# EAGLE board Syn-ShieldCarger-v07-tmp-a2 (EAGLE 5.10)
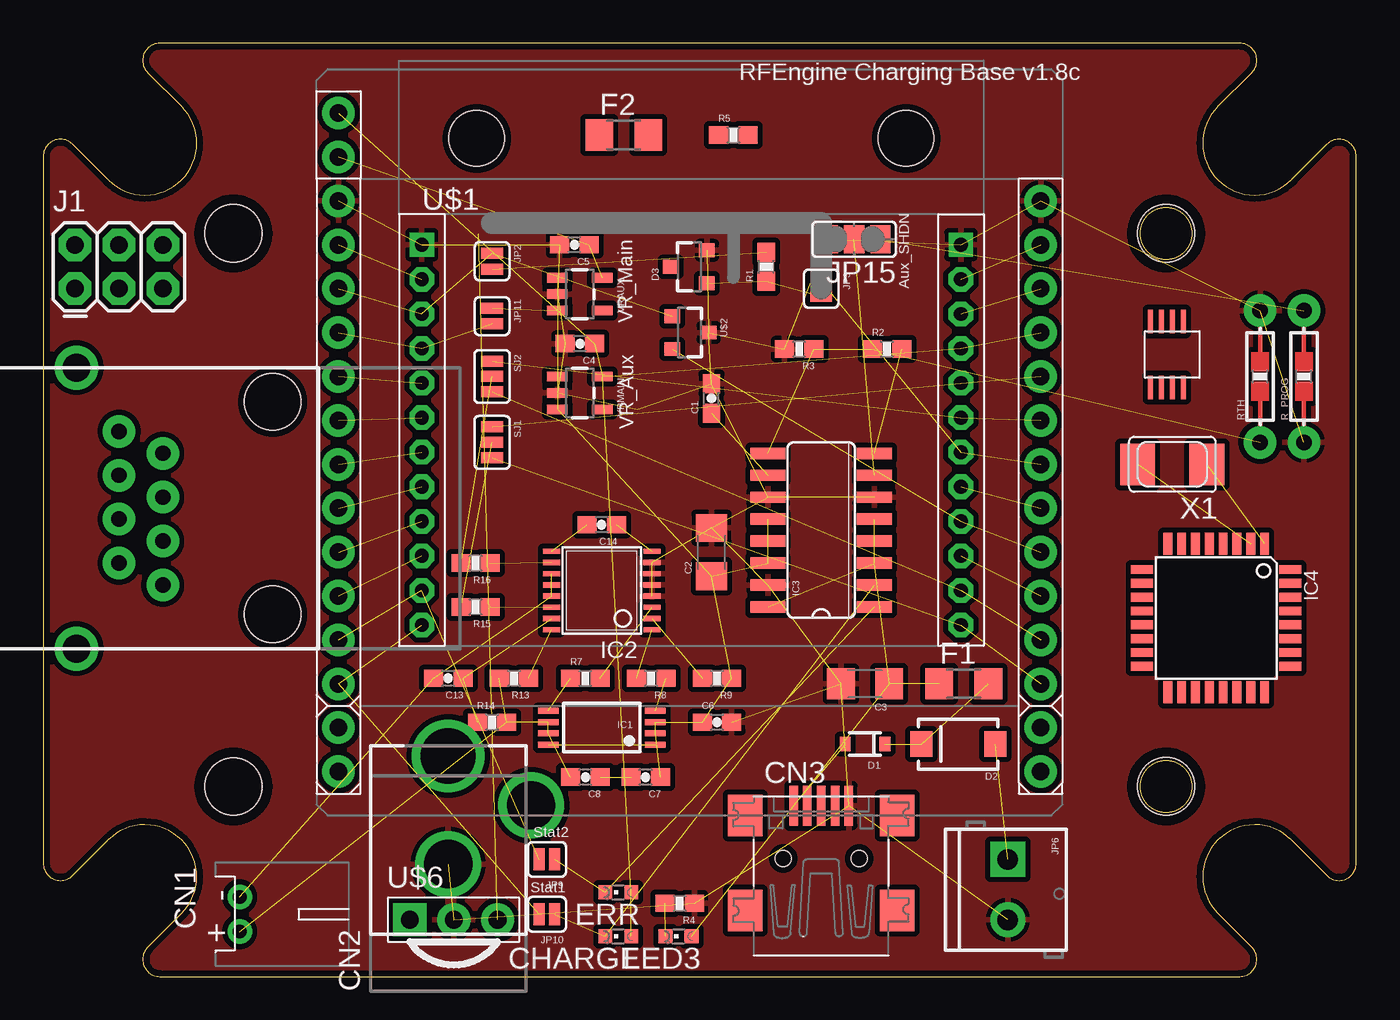
[diagram p0: board, top side]
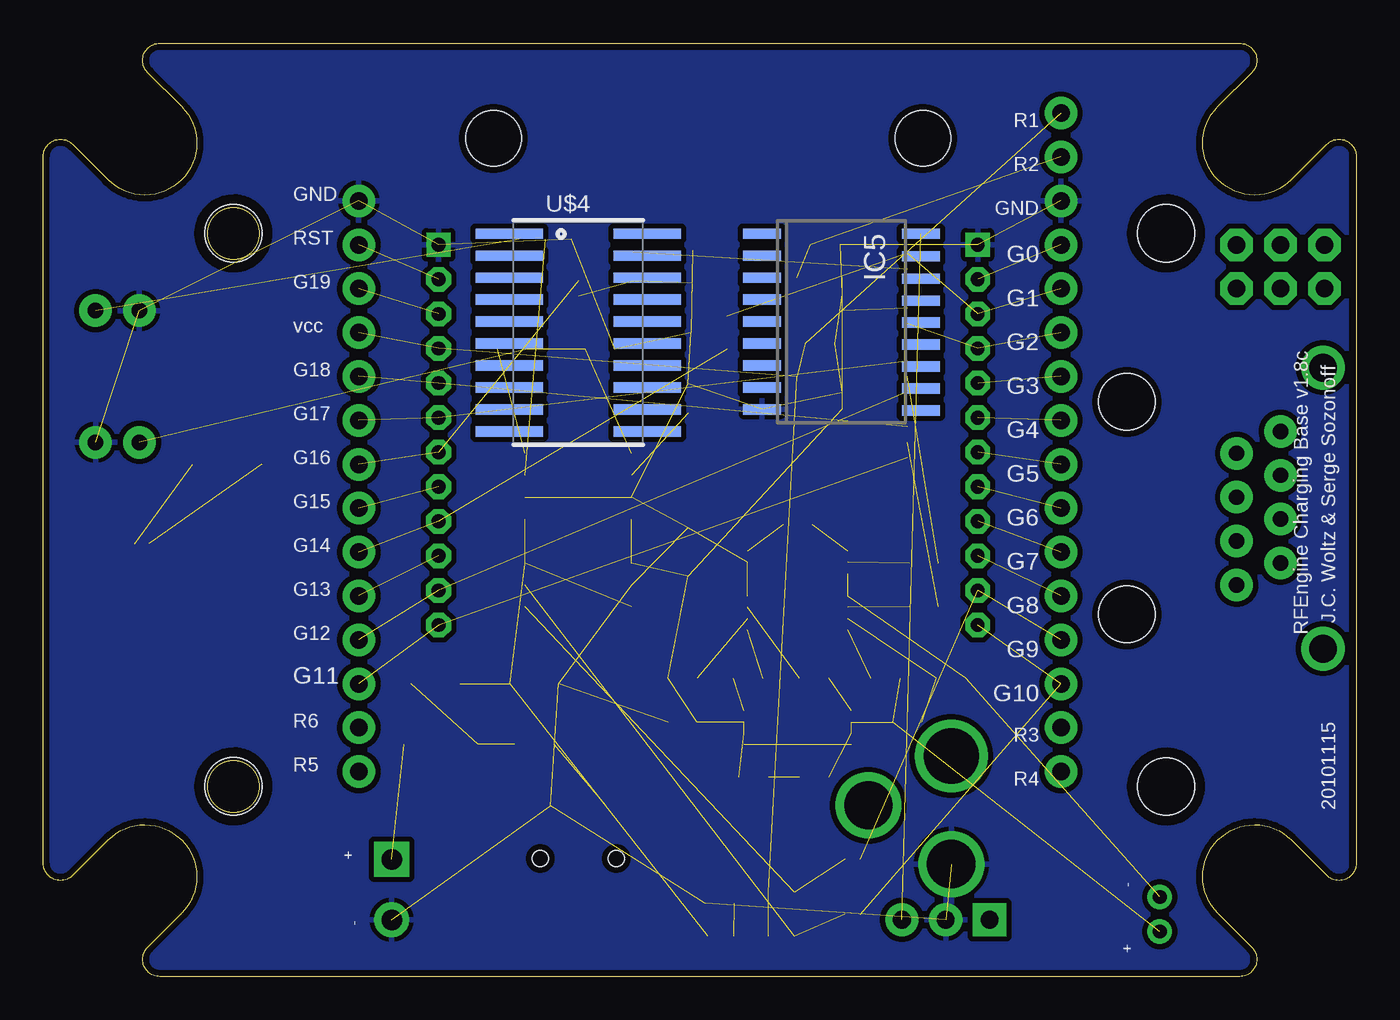
[diagram p1: board, bottom side, seen from below]

Size 76 x 54 mm. Coordinates in mm from the lower left corner, seen from the top.
Outline: 72.24,46.1 arc-180 68,50.34 69.95,52.29 arc135 69.24,54 6.75,54 arc135 6.05,52.29 8,50.34 arc-180 3.76,46.1 1.71,48.15 arc135 0,47.44 0,6.55 arc135 1.71,5.85 3.76,7.9 arc-180 8,3.66 6.05,1.71 arc135 6.75,0 69.24,0 arc135 69.95,1.71 68,3.66 arc-180 72.24,7.9 74.29,5.85 arc135 76,6.55 76,47.44 arc135 74.29,48.15 72.24,46.1
Outline: circle at 64.99,43 radius 1.5
Outline: circle at 64.99,11 radius 1.5
Copper layers (1*16): Top 0.0356mm / dielectric 1.5011mm / Bottom 0.0356mm
Design rules "LaenPCBOrder-JCModified *": minimum track width 10mil, minimum drill 13mil, track to track 10mil, track to pad 6mil, pad to pad 6mil, via to via 6mil, smd to smd 6mil, copper to edge 15mil, drill to drill 6mil, minimum pad ring 12mil, minimum via ring 7mil, stop-mask expansion 4mil, vias tented up to drill 25mil, thermal gap 10mil

## Footprints (pad centres in the part's own frame; a part is rotated, then mirrored left to right if it is on the bottom)
0603-CAP = smd 1.1 x 1: 1 -0.85,0; 2 0.85,0
1206 = smd 1.6 x 1.8: 1 -1.4,0; 2 1.4,0
CHIPLED_0603 = smd 0.8 x 0.8: A 0,-0.75; C 0,0.75
JST-PH-2-THM-RA = drill 0.8 pad 1.422 round: 1 1,0; 2 -1,0
DCJACK_2MM_PTH = drill 2.8 round: GND 0,7.35; GNDBREAK 4.8,10.75 | drill 3.2 round: PWR 0,13.6
USB-MINIB = smd 0.5 x 2.308: D+ 0,4.064; D- -0.8,4.064; GND 1.6,4.064; ID 0.8,4.064; VBUS -1.6,4.064 | smd 2 x 2.4: GND1 -4.4,-2; GND2 -4.4,3.5; GND3 4.4,3.5; GND4 4.4,-2 | hole 0.9: -2.2,1; 2.2,1
SOD-323 = smd 0.63 x 0.83: 1 -1.15,0; 2 1.15,0
SMA-DIODE = smd 1.27 x 1.47: A -2.15,0; C 2.15,0
SOT23-3 = smd 0.8 x 0.9: 1 -0.95,-1; 2 0.95,-1; 3 0,1.1
R1206 = smd 1.6 x 1.803: 1 -1.422,0; 2 1.422,0
TSSOP8-4.4MM = smd 1.2 x 0.35: 1 -3.1,0.975; 2 -3.1,0.325; 3 -3.1,-0.325; 4 -3.1,-0.975; 5 3.1,-0.975; 6 3.1,-0.325; 7 3.1,0.325; 8 3.1,0.975
DS2764 = smd 0.305 x 0.991: CC -2.275,-2.918; DC -0.975,-2.918; IS1 2.275,2.918; IS2 2.275,-2.918; PLS -1.625,-2.918; PS 1.625,-2.918; SCL -0.975,2.918; SDA 1.625,2.918; SNS -0.325,-2.918; SNS1 0.325,-2.918; SNS2 0.975,-2.918; VDD -1.625,2.918; VIN -2.275,2.918; VSS -0.325,2.918; VSS1 0.325,2.918; VSS2 0.975,2.918
SO16-150MIL = smd 0.66 x 2.032: 1 -4.445,-3.073; 2 -3.175,-3.073; 3 -1.905,-3.073; 4 -0.635,-3.073; 5 0.635,-3.073; 6 1.905,-3.073; 7 3.175,-3.073; 8 4.445,-3.073; 9 4.445,3.073; 10 3.175,3.073; 11 1.905,3.073; 12 0.635,3.073; 13 -0.635,3.073; 14 -1.905,3.073; 15 -3.175,3.073; 16 -4.445,3.073
TQFP32-08 = smd 1.27 x 0.508: 1 -4.293,2.8; 2 -4.293,2; 3 -4.293,1.2; 4 -4.293,0.4; 5 -4.293,-0.4; 6 -4.293,-1.2; 7 -4.293,-2; 8 -4.293,-2.8; 17 4.293,-2.8; 18 4.293,-2; 19 4.293,-1.2; 20 4.293,-0.4; 21 4.293,0.4; 22 4.293,1.2; 23 4.293,2; 24 4.293,2.8 | smd 0.508 x 1.27: 9 -2.8,-4.293; 10 -2,-4.293; 11 -1.2,-4.293; 12 -0.4,-4.293; 13 0.4,-4.293; 14 1.2,-4.293; 15 2,-4.293; 16 2.8,-4.293; 25 2.8,4.293; 26 2,4.293; 27 1.2,4.293; 28 0.4,4.293; 29 -0.4,4.293; 30 -1.2,4.293; 31 -2,4.293; 32 -2.8,4.293
SO18W = smd 0.6 x 2.2: 1 -4.445,-4.6; 2 -3.175,-4.6; 3 -1.905,-4.6; 4 -0.635,-4.6; 5 0.635,-4.6; 6 1.905,-4.6; 7 3.175,-4.6; 8 4.445,-4.6; 9 5.715,-4.6; 10 5.775,4.6; 11 4.505,4.6; 12 3.235,4.6; 13 1.965,4.6; 14 0.695,4.6; 15 -0.575,4.6; 16 -1.845,4.6; 17 -3.145,4.6; 18 -4.445,4.6
2X3 = drill 1.016 pad 1.88 octagon: 1 0,0; 2 0,2.54; 3 2.54,0; 4 2.54,2.54; 5 5.08,0; 6 5.08,2.54
SJ_2S = smd 0.635 x 1.27: 1 -0.45,0; 2 0.45,0
STAND-OFF = hole 3.302: 0,0
SCREWTERMINAL-3.5MM-2 = drill 1.2 pad 2.032 square: 1 0,0 | drill 1.2 pad 2.032 round: 2 3.5,0
SJ_2 = smd 1.168 x 1.6: 1 -1.524,0; 2 0,0; 3 1.524,0
0603-RES = smd 1.1 x 1: 1 -0.85,0; 2 0.85,0
AXIAL-0603 = drill 0.9 pad 1.88 round: P$1 -3.81,0; P$2 3.81,0
SJ_3 = smd 0.635 x 1.27: 1 -0.889,0; 2 0,0; 3 0.889,0
SYNAPSERFENGINE-THM = drill 0.8 square: 1 0,0; 24 31.2,0 | drill 0.8 pad 1.422 octagon: 2 0,-2; 3 0,-4; 4 0,-6; 5 0,-8; 6 0,-10; 7 0,-12; 8 0,-14; 9 0,-16; 10 0,-18; 11 0,-20; 12 0,-22; 13 31.2,-22; 14 31.2,-20; 15 31.2,-18; 16 31.2,-16; 17 31.2,-14; 18 31.2,-12; 19 31.2,-10; 20 31.2,-8; 21 31.2,-6; 22 31.2,-4; 23 31.2,-2 | hole 3.2: 3.17,6.16; 28.03,6.16
SYNSJ-STACK = drill 1.016 pad 1.88 round: G0 0,-7.62; G1 0,-10.16; G2 0,-12.7; G3 0,-15.24; G4 0,-17.78; G5 0,-20.32; G6 0,-22.86; G7 0,-25.4; G8 0,-27.94; G9 0,-30.48; G10 0,-33.02; G11 40.64,-33.02; G12 40.64,-30.48; G13 40.64,-27.94; G14 40.64,-25.4; G15 40.64,-22.86; G16 40.64,-20.32; G17 40.64,-17.78; G18 40.64,-15.24; GND 0,-5.08; GND1 40.64,-5.08; R1 0,0; R2 0,-2.54; R3 0,-35.56; R4 0,-38.1; R5 40.64,-38.1; R6 40.64,-35.56; RESERVED 40.64,-10.16; RESET 40.64,-7.62; VCC 40.64,-12.7
SO20W = smd 0.6 x 3.9: P$1 -5.715,-4; P$2 -4.445,-4; P$3 -3.175,-4; P$4 -1.905,-4; P$5 -0.635,-4; P$6 0.635,-4; P$7 1.905,-4; P$8 3.175,-4; P$9 4.445,-4; P$10 5.715,-4; P$11 5.715,4; P$12 4.445,4; P$13 3.175,4; P$14 1.905,4; P$15 0.635,4; P$16 -0.635,4; P$17 -1.905,4; P$18 -3.175,4; P$19 -4.445,4; P$20 -5.715,4
DCT = smd 0.3 x 1.35: 1 -1.27,-1.905; 2 -0.635,-1.905; 3 0,-1.905; 4 0.635,-1.905; 5 0.635,1.905; 6 0,1.905; 7 -0.635,1.905; 8 -1.27,1.905
PNA460XM = drill 1.016 pad 1.93 square: 1 -2.54,0 | drill 1.016 pad 1.93 round: 2 0,0; 3 2.54,0
XPORT = drill 0.889 pad 1.88 round: 1 -3.175,7.62; 8 4.445,7.62; 10 -4.445,5.08; P1 4.445,7.62; P2 3.175,5.08; P3 1.905,7.62; P4 0.635,5.08; P5 -0.635,7.62; P6 -1.905,5.08; P7 -3.175,7.62; P8 -4.445,5.08 | drill 1.6 pad 2.54 round: GND@9 -8.128,10.081; GND@10 8.128,10.081 | hole 3.251: -6.147,-1.27; 6.147,-1.27
SOT23-5 = smd 0.55 x 1.2: 1 -0.95,-1.3; 2 0,-1.3; 3 0.95,-1.3; 4 0.95,1.3; 5 -0.95,1.3
NX5032 = smd 2 x 2.4: P$1 2,0; P$2 -2,0

## Placement (x,y rotation side)
C1  0.47uF  [0603-CAP]  38.68,33.45 90 top
C2  10uF  [1206]  38.68,24.56 90 top
C3  10uF  [1206]  47.57,16.94 180 top
C4  1uF  [0603-CAP]  31.06,36.62 180 top
C5  1uF  [0603-CAP]  30.74,42.34 180 top
C6  1nF  [0603-CAP]  39,14.72 0 top
C7  [0603-CAP]  34.87,11.54 180 top
C8  [0603-CAP]  31.38,11.54 180 top
C13  0.1uF  [0603-CAP]  23.44,17.26 180 top
C14  0.1uF  [0603-CAP]  32.33,26.15 180 top
CHARGE  ORG  [CHIPLED_0603]  33.28,2.33 90 top
CN1  [JST-PH-2-THM-RA]  11.37,3.6 270 top
CN2  [DCJACK_2MM_PTH]  23.44,-0.84 0 top
CN3  [USB-MINIB]  45.03,5.83 0 top
D1  [SOD-323]  47.57,13.45 180 top
D2  [SMA-DIODE]  52.97,13.45 180 top
D3  ADR510  [SOT23-3]  37.41,41.07 90 top
ERR  RED  [CHIPLED_0603]  33.28,4.87 90 top
F1  [R1206]  53.28,16.94 0 top
F2  [R1206]  33.6,48.69 0 top
IC1  IRF7750  [TSSOP8-4.4MM]  32.33,14.4 180 top
IC2  DS2764  [DS2764]  32.33,22.34 90 top
IC3  [SO16-150MIL]  45.03,25.83 90 top
IC4  ATMEGA32U2-TQFP  [TQFP32-08]  67.89,20.75 270 top
IC5  MCP2300X/SO  [SO18W]  29.79,38.53 270 bottom
J1  AVR_SPI_PRG_6PTH  [2X3]  1.85,39.8 0 top
JP2  [SJ_2S]  25.98,41.39 270 top
JP3  [SJ_2S]  45.03,39.8 270 top
JP4  STAND-OFF  [STAND-OFF]  64.99,43 0 top
JP5  STAND-OFF  [STAND-OFF]  11.01,43 0 top
JP6  [SCREWTERMINAL-3.5MM-2]  55.82,6.78 270 top
JP9  [SJ_2S]  29.15,6.78 180 top
JP10  [SJ_2S]  29.15,3.6 180 top
JP11  [SJ_2S]  25.98,38.21 270 top
JP12  STAND-OFF  [STAND-OFF]  64.99,11 0 top
JP15  [SJ_2]  46.93,42.66 180 top
JP17  STAND-OFF  [STAND-OFF]  11.01,11 0 top
LED3  [CHIPLED_0603]  36.77,2.33 90 top
R1  10K  [0603-RES]  41.85,41.07 90 top
R2  6.19K  [0603-RES]  48.84,36.31 0 top
R3  7.3K  [0603-RES]  43.76,36.31 180 top
R4  1K  [0603-RES]  36.84,4.24 180 top
R5  [0603-RES]  39.95,48.69 0 top
R7  1K  [0603-RES]  31.38,17.26 0 top
R8  1K  [0603-RES]  35.19,17.26 180 top
R9  15R  [0603-RES]  39,17.26 180 top
R13  1K  [0603-RES]  27.25,17.26 180 top
R14  15R  [0603-RES]  25.98,14.72 0 top
R15  15R  [0603-RES]  25.03,21.38 180 top
R16  15R  [0603-RES]  25.03,23.92 180 top
R_PROG  [AXIAL-0603]  72.97,34.72 90 top
RTH  10K @ 25degC  [AXIAL-0603]  70.43,34.72 90 top
SJ1  [SJ_3]  25.98,30.91 270 top
SJ2  [SJ_3]  25.98,34.72 270 top
U$1  SYNAPSEWIRELESS-RFENGINESTD  [SYNAPSERFENGINE-THM]  21.92,42.34 0 top
U$2  MAX6520SOT23-3  [SOT23-3]  37.41,37.26 270 top
U$3  SYNAPSE-SJ-STCKINGD30-1600  [SYNSJ-STACK]  17.09,49.96 0 top
U$4  PCF2129ASO20  [SO20W]  45.03,37.26 270 bottom
U$5  PCA9306DCT  [DCT]  65.35,35.99 0 top
U$6  PNA460XM  [PNA460XM]  23.76,3.29 0 top
U$7  CREATIVE_COMMONS  [CREATIVE_COMMONS]  10.74,-9.73 0 top  (outside the outline)
U$8  XPORT  [XPORT]  12.01,27.1 90 top
VRAUX  MCP1802  [SOT23-5]  31.06,39.48 270 top
VRMAIN  MCP1802  [SOT23-5]  31.06,33.77 270 top
X1  [NX5032]  65.35,29.64 180 top

## Library data of the parts
C1-C8 C13 C14 D1 D2 J1 JP2-JP6 JP9-JP12 JP15 JP17 R1 R4 R5 R7-R9 R13-R16 SJ1 SJ2 U$7 U$8 = SparkFun
CHARGE CN1-CN3 ERR F1 F2 IC4 IC5 LED3 U$6 X1 = adafruit
D3 VRAUX VRMAIN = 0_jc-modified
IC1 IC2 = ssozonoff
IC3 R2 R3 R_PROG RTH U$1-U$5 = 0_jc-custom

## Nets
AUX_SHDN: JP11.1 VRAUX.3
CC: IC2.CC R8.2
DC: IC2.DC R7.2
GND: C1.2 C2.2 C3.2 C4.2 C5.2 C6.2 CN2.GND CN3.GND D3.2 IC2.PS IC2.SNS IC2.SNS1 IC2.SNS2 IC3.6 IC3.11 IC3.15 IC5.9 JP6.2 JP15.3 R3.2 R4.1 R_PROG.P$1 RTH.P$2 U$1.1 U$1.24 U$2.3 U$3.GND U$3.GND1 U$6.2 VRAUX.2 VRMAIN.2
GNDBREAK: CN2.GNDBREAK
GP0: U$1.2 U$3.G0
GP1: JP2.1 U$1.3 U$2.1 U$3.G1
GP2: JP11.2 U$1.4 U$3.G2
GP3: U$1.5 U$3.G3
GP4: U$1.6 U$3.G4
GP5: U$1.7 U$3.G5
GP6: U$1.8 U$3.G6
GP7: U$1.9 U$3.G7
GP8: U$1.10 U$3.G8
GP9: JP9.2 U$1.11 U$3.G9
GP10: JP10.2 U$1.12 U$3.G10
GP11: SJ1.3 U$1.13 U$3.G11
GP12: SJ2.3 U$1.14 U$3.G12
GP13: U$1.15 U$3.G13
GP14: U$1.16 U$2.2 U$3.G14
GP15: U$1.17 U$3.G15
GP16: JP3.1 U$1.18 U$3.G16
GP17: SJ2.1 U$1.19 U$3.G17
GP18: SJ1.1 U$1.20 U$3.G18
GP19: U$1.22 U$3.RESERVED
I2C_SCL: R15.2 SJ1.2
I2C_SDA: R16.2 SJ2.2
N$1: IC1.1 IC1.8
N$2: LED3.C R4.2
N$3: D3.1 JP3.2 R1.1
N$4: JP2.2 R1.2
N$5: IC1.4 R8.1
N$6: IC3.7 JP15.2
N$7: IC3.8 R2.2
N$8: IC3.9 R2.1 R3.1 RTH.P$1
N$9: C1.1 IC3.10
N$10: JP15.1 R_PROG.P$2
N$11: D1.1 D2.C F1.2
N$12: IC4.1 X1.P$2
N$13: IC4.2 X1.P$1
N$14: IC1.5 R7.1
N$15: IC2.VIN R13.1
N$16: C14.2 IC2.IS1
N$17: IC2.SCL R15.1
N$18: C13.1 IC2.VDD R14.1
N$19: C7.2 C8.1
N$21: CN3.VBUS D1.2
N$24: C14.1 IC2.IS2
N$25: IC2.SDA R16.1
PAC+: C8.2 CN1.1 IC1.6 IC1.7 R13.2 R14.2
PAC-: C13.2 CN1.2 IC2.VSS IC2.VSS1 IC2.VSS2
PLS: IC2.PLS R9.2
PWR: CN2.PWR
RESET: U$1.23 U$3.RESET
STAT1: CHARGE.C IC3.2 JP10.1
STAT2: ERR.C IC3.1 JP9.1
VBAT+: C2.1 C6.1 C7.1 IC1.2 IC1.3 IC3.12 IC3.13 IC3.14 R9.1 VRAUX.1 VRMAIN.1 VRMAIN.3
VCC: IC5.18 U$6.3
VCC3: C4.1 CHARGE.A ERR.A U$1.21 U$3.R1 U$3.VCC VRMAIN.5
VCC3_AUX: C5.1 U$3.R2 VRAUX.5
VIN: C3.1 F1.1 IC3.3 IC3.4 IC3.5 IC3.16 LED3.A
VINJ: D2.A JP6.1

## Tracks (layer width: path | path; a pad name or v marks a point on that pad's centre or on a via)
AUX_SHDN  (1 unrouted)
CC  (1 unrouted)
DC  (1 unrouted)
GND  (30 unrouted)
  pour Top (isolate 0.305): -0.69,0.43 -0.69,53.77 75.51,53.77 75.51,0.43
  pour Bottom (isolate 0.305): 0.58,53.77 0.58,0.43 75.51,0.43 75.51,53.77
GP0  (1 unrouted)
GP1  (3 unrouted)
GP2  (2 unrouted)
GP3  (1 unrouted)
GP4  (1 unrouted)
GP5  (1 unrouted)
GP6  (1 unrouted)
GP7  (1 unrouted)
GP8  (1 unrouted)
GP9  (2 unrouted)
GP10  (2 unrouted)
GP11  (2 unrouted)
GP12  (2 unrouted)
GP13  (1 unrouted)
GP14  (2 unrouted)
GP15  (1 unrouted)
GP16  (2 unrouted)
GP17  (2 unrouted)
GP18  (2 unrouted)
GP19  (1 unrouted)
I2C_SCL  (1 unrouted)
I2C_SDA  (1 unrouted)
N$1  (1 unrouted)
N$2  (1 unrouted)
N$3  (2 unrouted)
N$4  (1 unrouted)
N$5  (1 unrouted)
N$6  (1 unrouted)
N$7  (1 unrouted)
N$8  (3 unrouted)
N$9  (1 unrouted)
N$10  (1 unrouted)
N$11  (2 unrouted)
N$12  (1 unrouted)
N$13  (1 unrouted)
N$14  (1 unrouted)
N$15  (1 unrouted)
N$16  (1 unrouted)
N$17  (1 unrouted)
N$18  (2 unrouted)
N$19  (1 unrouted)
N$21  (1 unrouted)
N$24  (1 unrouted)
N$25  (1 unrouted)
PAC+  (5 unrouted)
PAC-  (4 unrouted)
PLS  (1 unrouted)
RESET  (1 unrouted)
STAT1  (2 unrouted)
STAT2  (2 unrouted)
VBAT+  (11 unrouted)
VCC  (1 unrouted)
VCC3  (6 unrouted)
VCC3_AUX  (2 unrouted)
VIN  (6 unrouted)
VINJ  (1 unrouted)

## Text on the board
tPlace: RFEngine Charging Base v1.8c | VR_Main | Aux_SHDN | VR_Aux | Stat2 | Stat1
bPlace: R1 | R2 | GND | GND | G0 | RST | G1 | G19 | G2 | vcc | G3 | G18 | G4 | G17 | G5 | G16 | G6 | G15 | G7 | G14 | G8 | G13 | J.C. Woltz & Serge Sozonoff | RFEngine Charging Base v1.8c | G9 | G12 | G10 | G11 | R3 | R6 | R4 | R5 | 20101115 | + | - | - | +